# Altium PCB Test.PcbDoc (part 1 of 9)
Units mm, origin at the board's own origin, x right, y up, seen from the top; angles counter-clockwise.
Board outline 152.4 x 101.6 mm, 2 copper layers (Top Layer, Bottom Layer); 1 components, 0 nets, 1713 pads, 1 vias.
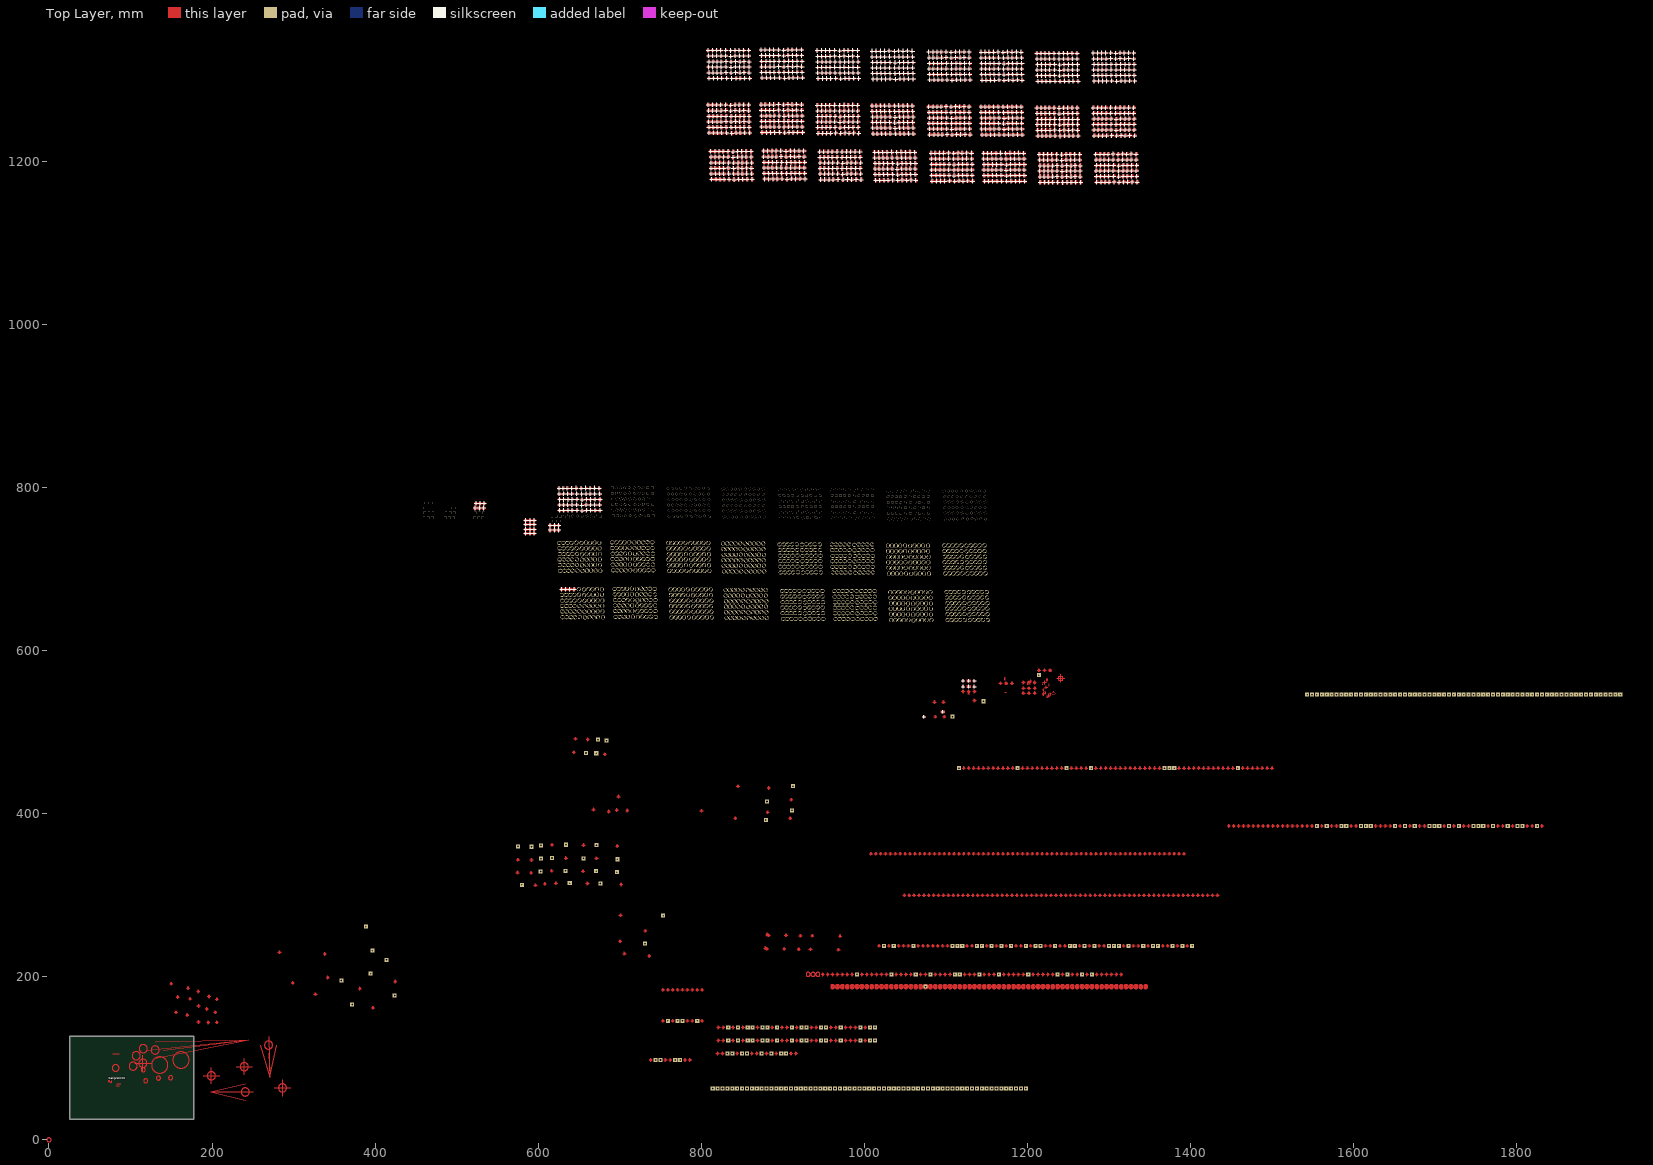
[diagram p0: Top Layer view]
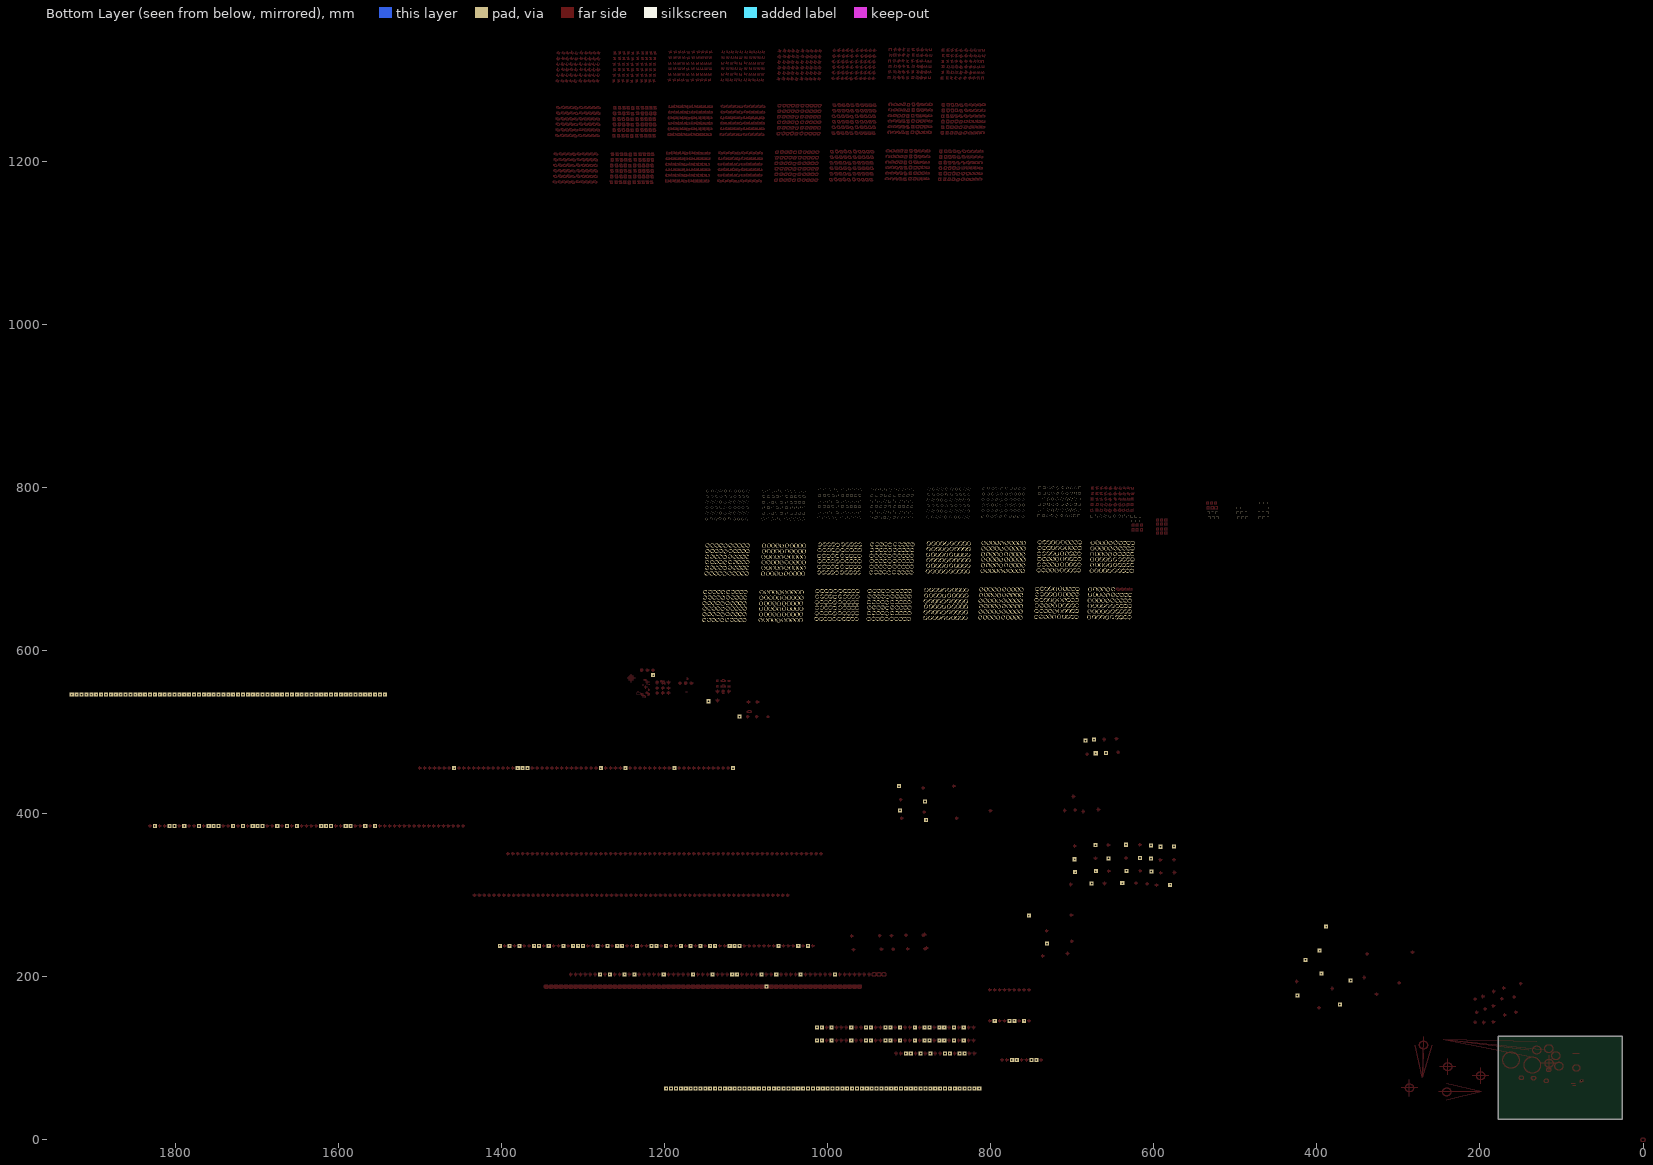
[diagram p1: Bottom Layer view, seen from below]

## Layer stack, top to bottom
Top Solder: solder mask 0.0102, Solder Resist, Dk 3.5
Top Layer: signal copper 0.0356
Dielectric 1: dielectric 0.32, FR-4, Dk 4.8
Bottom Layer: signal copper 0.0356
Bottom Solder: solder mask 0.0102, Solder Resist, Dk 3.5

## Board outline
25.4,25.4 177.8,25.4 177.8,127 25.4,127

## Design rules (kind name [scope] priority, off if disabled: settings)
Clearance [All] p1: gap=0.254 ignorepadtopadclearanceinfootprint=FALSE except(0: Arc-Hole Track-Hole SMDPad-Hole THPad-Hole Via-Hole Fill-Hole Poly-Hole Region-Hole Text-Hole)
PolygonConnect [All] p1: connectstyle=Relief reliefconductorwidth=0.254 reliefentries=4 polygonreliefangle="90 Angle" airgapwidth=0.254
RoutingVias [All] p1: holewidth=0.711 width=1.27 viastyle="Through Hole" minholewidth=0.711 minwidth=1.27 maxholewidth=0.711 maxwidth=1.27
SolderMaskExpansion [All] p1: expansion=0.102
Width [All] p1: maxlimit=5 minlimit=2539.975 preferedwidth=0.254 toplayer_minwidth=0 bottomlayer_minwidth=0 minimp=50.000000 maximp=50.000000 favimp=50.000000
30 further rules are at their usual default settings.

## Components (designator, comment, footprint, x,y, rotation, side; value= is the part's Value field where it differs from the comment)
Designator20 "Comment" TEST 73.152,71.374 r0 top

## Footprints (in the part's own frame and the unit in brackets; to place one, negate y for a bottom-side part, rotate by r counter-clockwise, add the part's x,y. Pads: shape width x height; smd on the part's side, far side on the other; paste and mask are expansions set on the pad)
TEST [mm]
  rect 0.2x0.25 smd: 0(0.635,1.27) 1(1.27,1.27)
  Top Layer circle w0.2: c3.175,0 r0.741
  Top Layer lines w0.2: 0,0 3.175,0 ccw(c2.222,0.953) 3.175,1.905 0,1.905 0,0

## Free pads (board coordinates)
  rect 5x5 hole 2: 0(1214,570) 1(358.648,195.453) 1(1108,519) 1(1146,538) 3(394.462,203.835) 4(388.62,261.493) 9(371.729,165.989) 11(423.926,177.165) 13(413.893,220.853) 14(396.494,232.029) 15(575.183,359.918) 15(591.82,359.537) 15(603.377,361.188) 15(633.984,361.95) 15(671.449,361.569) 15(753.237,274.955) 16(603.377,344.932) 16(616.966,345.694) 16(655.574,345.313) 16(696.976,344.17) 17(602.869,329.184) 17(633.476,329.946) 17(670.941,329.565) 17(696.468,328.422) 17(730.885,240.665) 18(579.882,312.801) 18(638.683,314.833) 18(676.148,314.452) 19(673.354,490.855) 19(683.768,489.585) 19(912.495,433.832) 20(658.622,474.472) 20(671.195,474.218) 20(880.491,415.036) 21(911.225,404.114) 22(879.221,392.303) 23(814,63) 23(1116,456) 23(1543,546) 24(744,98) 24(750,98) 24(759,146) 24(768,98) 24(771,146) 24(774,98) 24(777,146) 24(795,146) 24(820,63) 24(826,63) 24(832,63) 24(832,106) 24(833,122) 24(833,138) 24(838,63) 24(838,106) 24(844,63) 24(845,122) 24(845,138) 24(850,63) 24(850,106) 24(856,63) 24(856,106) 24(857,122) 24(857,138) 24(862,63) 24(863,122) 24(863,138) 24(868,63) 24(874,63) 24(874,106) 24(875,122) 24(875,138) 24(880,63) 24(881,122) 24(881,138) 24(886,63) 24(886,106) 24(892,63) 24(893,122) 24(893,138) 24(898,63) 24(898,106) 24(904,63) 24(904,106) 24(910,63) 24(911,122) 24(911,138) 24(916,63) 24(922,63) 24(923,122) 24(923,138) 24(928,63) 24(929,122) 24(929,138) 24(934,63) 24(940,63) 24(946,63) 24(947,122) 24(947,138) 24(952,63) 24(953,122) 24(953,138) 24(958,63) 24(964,63) 24(970,63) 24(971,122) 24(971,138) 24(976,63) 24(982,63) 24(988,63) 24(991,203) 24(994,63) 24(995,122) 24(995,138) 24(1000,63) 24(1006,63) 24(1007,122) 24(1007,138) 24(1012,63) 24(1013,122) 24(1013,138) 24(1018,63) 24(1024,238) 24(1024,63) 24(1030,63) 24(1033,203) 24(1036,238) 24(1036,63) 24(1042,63) 24(1048,63) 24(1054,63) 24(1060,238) 24(1060,63) 24(1063,203) 24(1066,63) 24(1072,63) 24(1075,188) 24(1078,63) 24(1081,203) 24(1084,63) 24(1090,63) 24(1096,63) 24(1102,63) 24(1108,238) 24(1108,63) 24(1111,203) 24(1114,238) 24(1114,63) 24(1117,203) 24(1120,238) 24(1120,63) 24(1126,63) 24(1132,63) 24(1138,238) 24(1138,63) 24(1141,203) 24(1144,238) 24(1144,63) 24(1150,63) 24(1156,238) 24(1156,63) 24(1162,63) 24(1165,203) 24(1168,238) 24(1168,63) 24(1174,63) 24(1180,238) 24(1180,63) 24(1186,63) 24(1188,456) 24(1192,63) 24(1198,238) 24(1198,63) 24(1201,203) 24(1210,238) 24(1216,238) 24(1234,238) 24(1237,203) 24(1248,456) 24(1249,203) 24(1252,238) 24(1258,238) 24(1267,203) 24(1270,238) 24(1278,456) 24(1279,203) 24(1282,238) 24(1300,238) 24(1306,238) 24(1312,238) 24(1324,238) 24(1342,238) 24(1354,238) 24(1360,238) 24(1368,456) 24(1374,456) 24(1378,238) 24(1380,456) 24(1390,238) 24(1402,238) 24(1458,456) 24(1549,546) 24(1555,385) 24(1555,546) 24(1561,546) 24(1567,385) 24(1567,546) 24(1573,546) 24(1579,546) 24(1585,385) 24(1585,546) 24(1591,385) 24(1591,546) 24(1597,546) 24(1603,546) 24(1609,385) 24(1609,546) 24(1615,385) 24(1615,546) 24(1621,385) 24(1621,546) 24(1627,546) 24(1633,546) 24(1639,546) 24(1645,546) 24(1651,546) 24(1651,385) 24(1657,546) 24(1663,546) 24(1663,385) 24(1669,546) 24(1675,546) 24(1675,385) 24(1681,546) 24(1687,546) 24(1693,546) 24(1693,385) 24(1699,546) 24(1699,385) 24(1705,546) 24(1705,385) 24(1711,546) 24(1717,546) 24(1717,385) 24(1723,546) 24(1729,546) 24(1729,385) 24(1735,546) 24(1741,546) 24(1747,385) 24(1747,546) 24(1753,385) 24(1753,546) 24(1759,385) 24(1759,546) 24(1765,546) 24(1771,385) 24(1771,546) 24(1777,546) 24(1783,546) 24(1789,385) 24(1789,546) 24(1795,546) 24(1801,385) 24(1801,546) 24(1807,385) 24(1807,546) 24(1813,546) 24(1819,546) 24(1825,385) 24(1825,546) 24(1831,546) 24(1837,546) 24(1843,546) 24(1849,546) 24(1855,546) 24(1861,546) 24(1867,546) 24(1873,546) 24(1879,546) 24(1885,546) 24(1891,546) 24(1897,546) 24(1903,546) 24(1909,546) 24(1915,546) 24(1921,546) 24(1927,546)
  rect 0x0 hole 2 slot 3 at 0 deg: 0(1232,547.5)
  rect 5x5 hole 5 square: 1(1230,558)
  rect 2.8x2.8 hole 2.54 square: 32(460,763) 32(461,769) 32(461,775) 32(462,781) 32(465,763) 32(466,769) 32(466,775) 32(467,781) 32(470,763) 32(471,769) 32(471,775) 32(472,781) 32(486,763) 32(487,769) 32(487,775) 32(488,781) 32(491,763) 32(492,769) 32(492,775) 32(493,781) 32(496,763) 32(497,769) 32(497,775) 32(498,781) 32(522,763) 32(523,769) 32(527,763) 32(528,769) 32(532,763) 32(533,769) 32(616,759) 32(617,765) 32(621,759) 32(622,765) 32(626,759) 32(627,765) 32(690.627,799.798) 32(691.135,779.351) 32(691.389,785.955) 32(691.897,765.508) 41(676.276,765) 41(739.903,799.798) 41(740.411,779.351) 41(740.665,785.955) 41(741.173,765.508)
  round 5 hole 2.54 slot 4 at 0 deg: 32(625.73,732.29) 32(626.238,711.843) 32(626.492,718.447) 32(627,698) 32(629.238,654.843) 32(629.492,661.447) 32(630,641) 32(690.627,732.798) 32(691.135,712.351) 32(691.389,718.955) 32(691.897,698.508) 32(693.627,675.798) 32(694.135,655.351) 32(694.389,661.955) 32(694.897,641.508) 41(739.903,732.798) 41(740.411,712.351) 41(740.665,718.955) 41(741.173,698.508) 41(742.903,675.798) 41(743.411,655.351) 41(743.665,661.955) 41(744.173,641.508)
  round 5 hole 2.54 slot 4 at 7 deg: 32(625.984,725.432) 32(628.984,668.432)
  round 5 hole 2.54 slot 4 at 173 deg: 32(626.492,704.985) 32(629.492,647.985)
  round 5 hole 2.54 slot 4 at 14 deg: 32(690.881,725.94) 32(693.881,668.94) 41(740.157,725.94) 41(743.157,668.94)
  rect 2.8x2.8 hole 2.54 square rot 7: 32(690.881,792.94)
  round 5 hole 2.54 slot 4 at 166 deg: 32(691.389,705.493) 32(694.389,648.493) 41(740.665,705.493) 41(743.665,648.493)
  rect 2.8x2.8 hole 2.54 square rot 173: 32(691.389,772.493)
  round 5 hole 2.54 slot 4 at 58 deg: 32(759.334,732.036) 32(759.588,725.178) 32(759.842,711.589) 32(760.096,704.731) 32(760.096,718.193) 32(760.604,697.746) 32(762.334,675.036) 32(762.588,668.178) 32(762.842,654.589) 32(763.096,647.731) 32(763.096,661.193) 32(763.604,640.746) 33(764.414,732.036) 33(764.668,725.178) 33(764.922,711.589) 33(765.176,704.731) 33(765.176,718.193) 33(765.684,697.746) 33(767.414,675.036) 33(767.668,668.178) 33(767.922,654.589) 33(768.176,647.731) 33(768.176,661.193) 33(768.684,640.746) 34(769.494,732.036) 34(769.748,725.178) 34(770.002,711.589) 34(770.256,704.731) 34(770.256,718.193) 34(770.764,697.746) 34(772.494,675.036) 34(772.748,668.178) 34(773.002,654.589) 34(773.256,647.731) 34(773.256,661.193) 34(773.764,640.746) 35(774.574,732.036) 35(774.828,725.178) 35(775.082,711.589) 35(775.336,704.731) 35(775.336,718.193) 35(775.844,697.746) 35(777.574,675.036) 35(777.828,668.178) 35(778.082,654.589) 35(778.336,647.731) 35(778.336,661.193) 35(778.844,640.746) 36(780.416,732.163) 36(780.67,725.305) 36(780.924,711.716) 36(781.178,704.858) 36(781.178,718.32) 36(781.686,697.873) 36(783.416,675.163) 36(783.67,668.305) 36(783.924,654.716) 36(784.178,647.858) 36(784.178,661.32) 36(784.686,640.873) 37(786.639,731.782) 37(786.893,724.924) 37(787.147,711.335) 37(787.401,704.477) 37(787.401,717.939) 37(787.909,697.492) 37(789.639,674.782) 37(789.893,667.924) 37(790.147,654.335) 37(790.401,647.477) 37(790.401,660.939) 37(790.909,640.492) 38(792.1,732.163) 38(792.354,725.305) 38(792.608,711.716) 38(792.862,704.858) 38(792.862,718.32) 38(793.37,697.873) 38(795.1,675.163) 38(795.354,668.305) 38(795.608,654.716) 38(795.862,647.858) 38(795.862,661.32) 38(796.37,640.873) 39(797.307,732.036) 39(797.561,725.178) 39(797.815,711.589) 39(798.069,704.731) 39(798.069,718.193) 39(798.577,697.746) 39(800.307,675.036) 39(800.561,668.178) 39(800.815,654.589) 39(801.069,647.731) 39(801.069,661.193) 39(801.577,640.746) 40(802.641,732.163) 40(802.895,725.305) 40(803.149,711.716) 40(803.403,704.858) 40(803.403,718.32) 40(803.911,697.873) 40(805.641,675.163) 40(805.895,668.305) 40(806.149,654.716) 40(806.403,647.858) 40(806.403,661.32) 40(806.911,640.873) 41(808.61,732.036) 41(808.864,725.178) 41(809.118,711.589) 41(809.372,704.731) 41(809.372,718.193) 41(809.88,697.746) 41(811.61,675.036) 41(811.864,668.178) 41(812.118,654.589) 41(812.372,647.731) 41(812.372,661.193) 41(812.88,640.746)
  rect 2.8x2.8 hole 2.54 square rot 58: 32(759.334,799.036) 32(759.588,792.178) 32(759.842,778.589) 32(760.096,771.731) 32(760.096,785.193) 32(760.604,764.746) 33(764.414,799.036) 33(764.668,792.178) 33(764.922,778.589) 33(765.176,771.731) 33(765.176,785.193) 33(765.684,764.746) 34(769.494,799.036) 34(769.748,792.178) 34(770.002,778.589) 34(770.256,771.731) 34(770.256,785.193) 34(770.764,764.746) 35(774.574,799.036) 35(774.828,792.178) 35(775.082,778.589) 35(775.336,771.731) 35(775.336,785.193) 35(775.844,764.746) 36(780.416,799.163) 36(780.67,792.305) 36(780.924,778.716) 36(781.178,771.858) 36(781.178,785.32) 36(781.686,764.873) 37(786.639,798.782) 37(786.893,791.924) 37(787.147,778.335) 37(787.401,771.477) 37(787.401,784.939) 37(787.909,764.492) 38(792.1,799.163) 38(792.354,792.305) 38(792.608,778.716) 38(792.862,771.858) 38(792.862,785.32) 38(793.37,764.873) 39(797.307,799.036) 39(797.561,792.178) 39(797.815,778.589) 39(798.069,771.731) 39(798.069,785.193) 39(798.577,764.746) 40(802.641,799.163) 40(802.895,792.305) 40(803.149,778.716) 40(803.403,771.858) 40(803.403,785.32) 40(803.911,764.873) 41(808.61,799.036) 41(808.864,792.178) 41(809.118,778.589) 41(809.372,771.731) 41(809.372,785.193) 41(809.88,764.746)
  round 5 hole 2.54 slot 4 at 122 deg: 32(826.644,731.401) 32(826.898,724.543) 32(827.152,710.954) 32(827.406,704.096) 32(827.406,717.558) 32(827.914,697.111) 32(829.644,674.401) 32(829.898,667.543) 32(830.152,653.954) 32(830.406,647.096) 32(830.406,660.558) 32(830.914,640.111) 33(831.724,731.401) 33(831.978,724.543) 33(832.232,710.954) 33(832.486,704.096) 33(832.486,717.558) 33(832.994,697.111) 33(834.724,674.401) 33(834.978,667.543) 33(835.232,653.954) 33(835.486,647.096) 33(835.486,660.558) 33(835.994,640.111) 34(836.804,731.401) 34(837.058,724.543) 34(837.312,710.954) 34(837.566,704.096) 34(837.566,717.558) 34(838.074,697.111) 34(839.804,674.401) 34(840.058,667.543) 34(840.312,653.954) 34(840.566,647.096) 34(840.566,660.558) 34(841.074,640.111) 35(841.884,731.401) 35(842.138,724.543) 35(842.392,710.954) 35(842.646,704.096) 35(842.646,717.558) 35(843.154,697.111) 35(844.884,674.401) 35(845.138,667.543) 35(845.392,653.954) 35(845.646,647.096) 35(845.646,660.558) 35(846.154,640.111) 36(847.726,731.528) 36(847.98,724.67) 36(848.234,711.081) 36(848.488,704.223) 36(848.488,717.685) 36(848.996,697.238) 36(850.726,674.528) 36(850.98,667.67) 36(851.234,654.081) 36(851.488,647.223) 36(851.488,660.685) 36(851.996,640.238) 37(853.949,731.147) 37(854.203,724.289) 37(854.457,710.7) 37(854.711,703.842) 37(854.711,717.304) 37(855.219,696.857) 37(856.949,674.147) 37(857.203,667.289) 37(857.457,653.7) 37(857.711,646.842) 37(857.711,660.304) 37(858.219,639.857) 38(859.41,731.528) 38(859.664,724.67) 38(859.918,711.081) 38(860.172,704.223) 38(860.172,717.685) 38(860.68,697.238) 38(862.41,674.528) 38(862.664,667.67) 38(862.918,654.081) 38(863.172,647.223) 38(863.172,660.685) 38(863.68,640.238) 39(864.617,731.401) 39(864.871,724.543) 39(865.125,710.954) 39(865.379,704.096) 39(865.379,717.558) 39(865.887,697.111) 39(867.617,674.401) 39(867.871,667.543) 39(868.125,653.954) 39(868.379,647.096) 39(868.379,660.558) 39(868.887,640.111) 40(869.951,731.528) 40(870.205,724.67) 40(870.459,711.081) 40(870.713,704.223) 40(870.713,717.685) 40(871.221,697.238) 40(872.951,674.528) 40(873.205,667.67) 40(873.459,654.081) 40(873.713,647.223) 40(873.713,660.685) 40(874.221,640.238) 41(875.92,731.401) 41(876.174,724.543) 41(876.428,710.954) 41(876.682,704.096) 41(876.682,717.558) 41(877.19,697.111) 41(878.92,674.401) 41(879.174,667.543) 41(879.428,653.954) 41(879.682,647.096) 41(879.682,660.558) 41(880.19,640.111)
  rect 2.8x2.8 hole 2.54 square rot 122: 32(826.644,798.401) 32(826.898,791.543) 32(827.152,777.954) 32(827.406,771.096) 32(827.406,784.558) 32(827.914,764.111) 33(831.724,798.401) 33(831.978,791.543) 33(832.232,777.954) 33(832.486,771.096) 33(832.486,784.558) 33(832.994,764.111) 34(836.804,798.401) 34(837.058,791.543) 34(837.312,777.954) 34(837.566,771.096) 34(837.566,784.558) 34(838.074,764.111) 35(841.884,798.401) 35(842.138,791.543) 35(842.392,777.954) 35(842.646,771.096) 35(842.646,784.558) 35(843.154,764.111) 36(847.726,798.528) 36(847.98,791.67) 36(848.234,778.081) 36(848.488,771.223) 36(848.488,784.685) 36(848.996,764.238) 37(853.949,798.147) 37(854.203,791.289) 37(854.457,777.7) 37(854.711,770.842) 37(854.711,784.304) 37(855.219,763.857) 38(859.41,798.528) 38(859.664,791.67) 38(859.918,778.081) 38(860.172,771.223) 38(860.172,784.685) 38(860.68,764.238) 39(864.617,798.401) 39(864.871,791.543) 39(865.125,777.954) 39(865.379,771.096) 39(865.379,784.558) 39(865.887,764.111) 40(869.951,798.528) 40(870.205,791.67) 40(870.459,778.081) 40(870.713,771.223) 40(870.713,784.685) 40(871.221,764.238) 41(875.92,798.401) 41(876.174,791.543) 41(876.428,777.954) 41(876.682,771.096) 41(876.682,784.558) 41(877.19,764.111)
  round 5 hole 2.54 slot 4 at 10.7 deg: 32(896.113,730.258) 32(896.367,723.4) 32(896.621,709.811) 32(896.875,702.953) 32(896.875,716.415) 32(897.383,695.968) 32(899.113,673.258) 32(899.367,666.4) 32(899.621,652.811) 32(899.875,645.953) 32(899.875,659.415) 32(900.383,638.968) 33(901.193,730.258) 33(901.447,723.4) 33(901.701,709.811) 33(901.955,702.953) 33(901.955,716.415) 33(902.463,695.968) 33(904.193,673.258) 33(904.447,666.4) 33(904.701,652.811) 33(904.955,645.953) 33(904.955,659.415) 33(905.463,638.968) 34(906.273,730.258) 34(906.527,723.4) 34(906.781,709.811) 34(907.035,702.953) 34(907.035,716.415) 34(907.543,695.968) 34(909.273,673.258) 34(909.527,666.4) 34(909.781,652.811) 34(910.035,645.953) 34(910.035,659.415) 34(910.543,638.968) 35(911.353,730.258) 35(911.607,723.4) 35(911.861,709.811) 35(912.115,702.953) 35(912.115,716.415) 35(912.623,695.968) 35(914.353,673.258) 35(914.607,666.4) 35(914.861,652.811) 35(915.115,645.953) 35(915.115,659.415) 35(915.623,638.968) 36(917.195,730.385) 36(917.449,723.527) 36(917.703,709.938) 36(917.957,703.08) 36(917.957,716.542) 36(918.465,696.095) 36(920.195,673.385) 36(920.449,666.527) 36(920.703,652.938) 36(920.957,646.08) 36(920.957,659.542) 36(921.465,639.095) 37(923.418,730.004) 37(923.672,723.146) 37(923.926,709.557) 37(924.18,702.699) 37(924.18,716.161) 37(924.688,695.714) 37(926.418,673.004) 37(926.672,666.146) 37(926.926,652.557) 37(927.18,645.699) 37(927.18,659.161) 37(927.688,638.714) 38(928.879,730.385) 38(929.133,723.527) 38(929.387,709.938) 38(929.641,703.08) 38(929.641,716.542) 38(930.149,696.095) 38(931.879,673.385) 38(932.133,666.527) 38(932.387,652.938) 38(932.641,646.08) 38(932.641,659.542) 38(933.149,639.095) 39(934.086,730.258) 39(934.34,723.4) 39(934.594,709.811) 39(934.848,702.953) 39(934.848,716.415) 39(935.356,695.968) 39(937.086,673.258) 39(937.34,666.4) 39(937.594,652.811) 39(937.848,645.953) 39(937.848,659.415) 39(938.356,638.968) 40(939.42,730.385) 40(939.674,723.527) 40(939.928,709.938) 40(940.182,703.08) 40(940.182,716.542) 40(940.69,696.095) 40(942.42,673.385) 40(942.674,666.527) 40(942.928,652.938) 40(943.182,646.08) 40(943.182,659.542) 40(943.69,639.095) 41(945.389,730.258) 41(945.643,723.4) 41(945.897,709.811) 41(946.151,702.953) 41(946.151,716.415) 41(946.659,695.968) 41(948.389,673.258) 41(948.643,666.4) 41(948.897,652.811) 41(949.151,645.953) 41(949.151,659.415) 41(949.659,638.968)
  rect 2.8x2.8 hole 2.54 square rot 10.7: 32(896.113,797.258) 32(896.367,790.4) 32(896.621,776.811) 32(896.875,769.953) 32(896.875,783.415) 32(897.383,762.968) 33(901.193,797.258) 33(901.447,790.4) 33(901.701,776.811) 33(901.955,769.953) 33(901.955,783.415) 33(902.463,762.968) 34(906.273,797.258) 34(906.527,790.4) 34(906.781,776.811) 34(907.035,769.953) 34(907.035,783.415) 34(907.543,762.968) 35(911.353,797.258) 35(911.607,790.4) 35(911.861,776.811) 35(912.115,769.953) 35(912.115,783.415) 35(912.623,762.968) 36(917.195,797.385) 36(917.449,790.527) 36(917.703,776.938) 36(917.957,770.08) 36(917.957,783.542) 36(918.465,763.095) 37(923.418,797.004) 37(923.672,790.146) 37(923.926,776.557) 37(924.18,769.699) 37(924.18,783.161) 37(924.688,762.714) 38(928.879,797.385) 38(929.133,790.527) 38(929.387,776.938) 38(929.641,770.08) 38(929.641,783.542) 38(930.149,763.095) 39(934.086,797.258) 39(934.34,790.4) 39(934.594,776.811) 39(934.848,769.953) 39(934.848,783.415) 39(935.356,762.968) 40(939.42,797.385) 40(939.674,790.527) 40(939.928,776.938) 40(940.182,770.08) 40(940.182,783.542) 40(940.69,763.095) 41(945.389,797.258) 41(945.643,790.4) 41(945.897,776.811) 41(946.151,769.953) 41(946.151,783.415) 41(946.659,762.968)
  round 5 hole 2.54 slot 4 at 169.3 deg: 32(960.248,730.131) 32(960.502,723.273) 32(960.756,709.684) 32(961.01,702.826) 32(961.01,716.288) 32(961.518,695.841) 32(963.248,673.131) 32(963.502,666.273) 32(963.756,652.684) 32(964.01,645.826) 32(964.01,659.288) 32(964.518,638.841) 33(965.328,730.131) 33(965.582,723.273) 33(965.836,709.684) 33(966.09,702.826) 33(966.09,716.288) 33(966.598,695.841) 33(968.328,673.131) 33(968.582,666.273) 33(968.836,652.684) 33(969.09,645.826) 33(969.09,659.288) 33(969.598,638.841) 34(970.408,730.131) 34(970.662,723.273) 34(970.916,709.684) 34(971.17,702.826) 34(971.17,716.288) 34(971.678,695.841) 34(973.408,673.131) 34(973.662,666.273) 34(973.916,652.684) 34(974.17,645.826) 34(974.17,659.288) 34(974.678,638.841) 35(975.488,730.131) 35(975.742,723.273) 35(975.996,709.684) 35(976.25,702.826) 35(976.25,716.288) 35(976.758,695.841) 35(978.488,673.131) 35(978.742,666.273) 35(978.996,652.684) 35(979.25,645.826) 35(979.25,659.288) 35(979.758,638.841) 36(981.33,730.258) 36(981.584,723.4) 36(981.838,709.811) 36(982.092,702.953) 36(982.092,716.415) 36(982.6,695.968) 36(984.33,673.258) 36(984.584,666.4) 36(984.838,652.811) 36(985.092,645.953) 36(985.092,659.415) 36(985.6,638.968) 37(987.553,729.877) 37(987.807,723.019) 37(988.061,709.43) 37(988.315,702.572) 37(988.315,716.034) 37(988.823,695.587) 37(990.553,672.877) 37(990.807,666.019) 37(991.061,652.43) 37(991.315,645.572) 37(991.315,659.034) 37(991.823,638.587) 38(993.014,730.258) 38(993.268,723.4) 38(993.522,709.811) 38(993.776,702.953) 38(993.776,716.415) 38(994.284,695.968) 38(996.014,673.258) 38(996.268,666.4) 38(996.522,652.811) 38(996.776,645.953) 38(996.776,659.415) 38(997.284,638.968) 39(998.221,730.131) 39(998.475,723.273) 39(998.729,709.684) 39(998.983,702.826) 39(998.983,716.288) 39(999.491,695.841) 39(1001.221,673.131) 39(1001.475,666.273) 39(1001.729,652.684) 39(1001.983,645.826) 39(1001.983,659.288) 39(1002.491,638.841) 40(1003.555,730.258) 40(1003.809,723.4) 40(1004.063,709.811) 40(1004.317,702.953) 40(1004.317,716.415) 40(1004.825,695.968) 40(1006.555,673.258) 40(1006.809,666.4) 40(1007.063,652.811) 40(1007.317,645.953) 40(1007.317,659.415) 40(1007.825,638.968) 41(1009.524,730.131) 41(1009.778,723.273) 41(1010.032,709.684) 41(1010.286,702.826) 41(1010.286,716.288) 41(1010.794,695.841) 41(1012.524,673.131) 41(1012.778,666.273) 41(1013.032,652.684) 41(1013.286,645.826) 41(1013.286,659.288) 41(1013.794,638.841)
  rect 2.8x2.8 hole 2.54 square rot 169.3: 32(960.248,797.131) 32(960.502,790.273) 32(960.756,776.684) 32(961.01,769.826) 32(961.01,783.288) 32(961.518,762.841) 33(965.328,797.131) 33(965.582,790.273) 33(965.836,776.684) 33(966.09,769.826) 33(966.09,783.288) 33(966.598,762.841) 34(970.408,797.131) 34(970.662,790.273) 34(970.916,776.684) 34(971.17,769.826) 34(971.17,783.288) 34(971.678,762.841) 35(975.488,797.131) 35(975.742,790.273) 35(975.996,776.684) 35(976.25,769.826) 35(976.25,783.288) 35(976.758,762.841) 36(981.33,797.258) 36(981.584,790.4) 36(981.838,776.811) 36(982.092,769.953) 36(982.092,783.415) 36(982.6,762.968) 37(987.553,796.877) 37(987.807,790.019) 37(988.061,776.43) 37(988.315,769.572) 37(988.315,783.034) 37(988.823,762.587) 38(993.014,797.258) 38(993.268,790.4) 38(993.522,776.811) 38(993.776,769.953) 38(993.776,783.415) 38(994.284,762.968) 39(998.221,797.131) 39(998.475,790.273) 39(998.729,776.684) 39(998.983,769.826) 39(998.983,783.288) 39(999.491,762.841) 40(1003.555,797.258) 40(1003.809,790.4) 40(1004.063,776.811) 40(1004.317,769.953) 40(1004.317,783.415) 40(1004.825,762.968) 41(1009.524,797.131) 41(1009.778,790.273) 41(1010.032,776.684) 41(1010.286,769.826) 41(1010.286,783.288) 41(1010.794,762.841)
  round 5 hole 2.54 slot 4 at 80 deg: 32(1028.701,728.734) 32(1028.955,721.876) 32(1029.209,708.287) 32(1029.463,701.429) 32(1029.463,714.891) 32(1029.971,694.444) 32(1031.701,671.734) 32(1031.955,664.876) 32(1032.209,651.287) 32(1032.463,644.429) 32(1032.463,657.891) 32(1032.971,637.444) 33(1033.781,728.734) 33(1034.035,721.876) 33(1034.289,708.287) 33(1034.543,701.429) 33(1034.543,714.891) 33(1035.051,694.444) 33(1036.781,671.734) 33(1037.035,664.876) 33(1037.289,651.287) 33(1037.543,644.429) 33(1037.543,657.891) 33(1038.051,637.444) 34(1038.861,728.734) 34(1039.115,721.876) 34(1039.369,708.287) 34(1039.623,701.429) 34(1039.623,714.891) 34(1040.131,694.444) 34(1041.861,671.734) 34(1042.115,664.876) 34(1042.369,651.287) 34(1042.623,644.429) 34(1042.623,657.891) 34(1043.131,637.444) 35(1043.941,728.734) 35(1044.195,721.876) 35(1044.449,708.287) 35(1044.703,701.429) 35(1044.703,714.891) 35(1045.211,694.444) 35(1046.941,671.734) 35(1047.195,664.876) 35(1047.449,651.287) 35(1047.703,644.429) 35(1047.703,657.891) 35(1048.211,637.444) 36(711.709,732.925) 36(712.471,719.082) 36(714.709,675.925) 36(715.471,662.082) 36(1049.783,728.861) 36(1050.037,722.003) 36(1050.291,708.414) 36(1050.545,701.556) 36(1050.545,715.018) 36(1051.053,694.571) 36(1052.783,671.861) 36(1053.037,665.003) 36(1053.291,651.414) 36(1053.545,644.556) 36(1053.545,658.018) 36(1054.053,637.571) 37(718.44,712.097) 37(719.202,698.254) 37(721.44,655.097) 37(722.202,641.254) 37(1056.006,728.48) 37(1056.26,721.622) 37(1056.514,708.033) 37(1056.768,701.175) 37(1056.768,714.637) 37(1057.276,694.19) 37(1059.006,671.48) 37(1059.26,664.622) 37(1059.514,651.033) 37(1059.768,644.175) 37(1059.768,657.637) 37(1060.276,637.19) 38(1061.467,728.861) 38(1061.721,722.003) 38(1061.975,708.414) 38(1062.229,701.556) 38(1062.229,715.018) 38(1062.737,694.571) 38(1064.467,671.861) 38(1064.721,665.003) 38(1064.975,651.414) 38(1065.229,644.556) 38(1065.229,658.018) 38(1065.737,637.571) 39(1066.674,728.734) 39(1066.928,721.876) 39(1067.182,708.287) 39(1067.436,701.429) 39(1067.436,714.891) 39(1067.944,694.444) 39(1069.674,671.734) 39(1069.928,664.876) 39(1070.182,651.287) 39(1070.436,644.429) 39(1070.436,657.891) 39(1070.944,637.444) 40(669.037,732.417) 40(669.799,718.574) 40(672.037,675.417) 40(672.799,661.574) 40(1072.008,728.861) 40(1072.262,722.003) 40(1072.516,708.414) 40(1072.77,701.556) 40(1072.77,715.018) 40(1073.278,694.571) 40(1075.008,671.861) 40(1075.262,665.003) 40(1075.516,651.414) 40(1075.77,644.556) 40(1075.77,658.018) 40(1076.278,637.571) 41(1077.977,728.734) 41(1078.231,721.876) 41(1078.485,708.287) 41(1078.739,701.429) 41(1078.739,714.891) 41(1079.247,694.444) 41(1080.977,671.734) 41(1081.231,664.876) 41(1081.485,651.287) 41(1081.739,644.429) 41(1081.739,657.891) 41(1082.247,637.444)
  rect 2.8x2.8 hole 2.54 square rot 80: 32(1028.701,795.734) 32(1028.955,788.876) 32(1029.209,775.287) 32(1029.463,768.429) 32(1029.463,781.891) 32(1029.971,761.444) 33(1033.781,795.734) 33(1034.035,788.876) 33(1034.289,775.287) 33(1034.543,768.429) 33(1034.543,781.891) 33(1035.051,761.444) 34(1038.861,795.734) 34(1039.115,788.876) 34(1039.369,775.287) 34(1039.623,768.429) 34(1039.623,781.891) 34(1040.131,761.444) 35(1043.941,795.734) 35(1044.195,788.876) 35(1044.449,775.287) 35(1044.703,768.429) 35(1044.703,781.891) 35(1045.211,761.444) 36(1049.783,795.861) 36(1050.037,789.003) 36(1050.291,775.414) 36(1050.545,768.556) 36(1050.545,782.018) 36(1051.053,761.571) 37(1056.006,795.48) 37(1056.26,788.622) 37(1056.514,775.033) 37(1056.768,768.175) 37(1056.768,781.637) 37(1057.276,761.19) 38(1061.467,795.861) 38(1061.721,789.003) 38(1061.975,775.414) 38(1062.229,768.556) 38(1062.229,782.018) 38(1062.737,761.571) 39(1066.674,795.734) 39(1066.928,788.876) 39(1067.182,775.287) 39(1067.436,768.429) 39(1067.436,781.891) 39(1067.944,761.444) 40(733.934,799.925) 40(734.696,786.082) 40(1072.008,795.861) 40(1072.262,789.003) 40(1072.516,775.414) 40(1072.77,768.556) 40(1072.77,782.018) 40(1073.278,761.571) 41(1077.977,795.734) 41(1078.231,788.876) 41(1078.485,775.287) 41(1078.739,768.429) 41(1078.739,781.891) 41(1079.247,761.444)
  round 5 hole 2.54 slot 4 at 32.42 deg: 32(1097.916,728.988) 32(1098.17,722.13) 32(1098.424,708.541) 32(1098.678,701.683) 32(1098.678,715.145) 32(1099.186,694.698) 32(1100.916,671.988) 32(1101.17,665.13) 32(1101.424,651.541) 32(1101.678,644.683) 32(1101.678,658.145) 32(1102.186,637.698) 33(1102.996,728.988) 33(1103.25,722.13) 33(1103.504,708.541) 33(1103.758,701.683) 33(1103.758,715.145) 33(1104.266,694.698) 33(1105.996,671.988) 33(1106.25,665.13) 33(1106.504,651.541) 33(1106.758,644.683) 33(1106.758,658.145) 33(1107.266,637.698) 34(1108.076,728.988) 34(1108.33,722.13) 34(1108.584,708.541) 34(1108.838,701.683) 34(1108.838,715.145) 34(1109.346,694.698) 34(1111.076,671.988) 34(1111.33,665.13) 34(1111.584,651.541) 34(1111.838,644.683) 34(1111.838,658.145) 34(1112.346,637.698) 35(1113.156,728.988) 35(1113.41,722.13) 35(1113.664,708.541) 35(1113.918,701.683) 35(1113.918,715.145) 35(1114.426,694.698) 35(1116.156,671.988) 35(1116.41,665.13) 35(1116.664,651.541) 35(1116.918,644.683) 35(1116.918,658.145) 35(1117.426,637.698) 36(1118.998,729.115) 36(1119.252,722.257) 36(1119.506,708.668) 36(1119.76,701.81) 36(1119.76,715.272) 36(1120.268,694.825) 36(1121.998,672.115) 36(1122.252,665.257) 36(1122.506,651.668) 36(1122.76,644.81) 36(1122.76,658.272) 36(1123.268,637.825) 37(1125.221,728.734) 37(1125.475,721.876) 37(1125.729,708.287) 37(1125.983,701.429) 37(1125.983,714.891) 37(1126.491,694.444) 37(1128.221,671.734) 37(1128.475,664.876) 37(1128.729,651.287) 37(1128.983,644.429) 37(1128.983,657.891) 37(1129.491,637.444) 38(1130.682,729.115) 38(1130.936,722.257) 38(1131.19,708.668) 38(1131.444,701.81) 38(1131.444,715.272) 38(1131.952,694.825) 38(1133.682,672.115) 38(1133.936,665.257) 38(1134.19,651.668) 38(1134.444,644.81) 38(1134.444,658.272) 38(1134.952,637.825) 39(1135.889,728.988) 39(1136.143,722.13) 39(1136.397,708.541) 39(1136.651,701.683) 39(1136.651,715.145) 39(1137.159,694.698) 39(1138.889,671.988) 39(1139.143,665.13) 39(1139.397,651.541) 39(1139.651,644.683) 39(1139.651,658.145) 39(1140.159,637.698) 40(1141.223,729.115) 40(1141.477,722.257) 40(1141.731,708.668) 40(1141.985,701.81) 40(1141.985,715.272) 40(1142.493,694.825) 40(1144.223,672.115) 40(1144.477,665.257) 40(1144.731,651.668) 40(1144.985,644.81) 40(1144.985,658.272) 40(1145.493,637.825) 41(1147.192,728.988) 41(1147.446,722.13) 41(1147.7,708.541) 41(1147.954,701.683) 41(1147.954,715.145) 41(1148.462,694.698) 41(1150.192,671.988) 41(1150.446,665.13) 41(1150.7,651.541) 41(1150.954,644.683) 41(1150.954,658.145) 41(1151.462,637.698)
  rect 2.8x2.8 hole 2.54 square rot 32.42: 32(1097.916,795.988) 32(1098.17,789.13) 32(1098.424,775.541) 32(1098.678,768.683) 32(1098.678,782.145) 32(1099.186,761.698) 33(1102.996,795.988) 33(1103.25,789.13) 33(1103.504,775.541) 33(1103.758,768.683) 33(1103.758,782.145) 33(1104.266,761.698) 34(1108.076,795.988) 34(1108.33,789.13) 34(1108.584,775.541) 34(1108.838,768.683) 34(1108.838,782.145) 34(1109.346,761.698) 35(1113.156,795.988) 35(1113.41,789.13) 35(1113.664,775.541) 35(1113.918,768.683) 35(1113.918,782.145) 35(1114.426,761.698) 36(1118.998,796.115) 36(1119.252,789.257) 36(1119.506,775.668) 36(1119.76,768.81) 36(1119.76,782.272) 36(1120.268,761.825) 37(1125.221,795.734) 37(1125.475,788.876) 37(1125.729,775.287) 37(1125.983,768.429) 37(1125.983,781.891) 37(1126.491,761.444) 38(1130.682,796.115) 38(1130.936,789.257) 38(1131.19,775.668) 38(1131.444,768.81) 38(1131.444,782.272) 38(1131.952,761.825) 39(1135.889,795.988) 39(1136.143,789.13) 39(1136.397,775.541) 39(1136.651,768.683) 39(1136.651,782.145) 39(1137.159,761.698) 40(1141.223,796.115) 40(1141.477,789.257) 40(1141.731,775.668) 40(1141.985,768.81) 40(1141.985,782.272) 40(1142.493,761.825) 41(1147.192,795.988) 41(1147.446,789.13) 41(1147.7,775.541) 41(1147.954,768.683) 41(1147.954,782.145) 41(1148.462,761.698)
  round 5 hole 2.54 slot 4 at 10 deg: 33(630.81,732.29) 33(631.572,718.447) 33(634.572,661.447)
  round 5 hole 2.54 slot 4 at 17 deg: 33(631.064,725.432) 33(634.064,668.432)
  round 5 hole 2.54 slot 4 at 170 deg: 33(631.318,711.843) 33(632.08,698) 33(634.318,654.843) 33(635.08,641)
  round 5 hole 2.54 slot 4 at 163 deg: 33(631.572,704.985) 33(634.572,647.985)
  rect 2.8x2.8 hole 2.54 square rot 170: 33(632.08,765) 33(696.215,779.351) 33(696.977,765.508)
  round 5 hole 2.54 slot 4 at 20 deg: 33(695.707,732.798) 33(696.469,718.955) 33(698.707,675.798) 33(699.469,661.955) 34(635.89,732.29) 34(636.652,718.447) 34(639.652,661.447) 40(734.442,712.478) 40(735.204,698.635) 40(737.442,655.478) 40(738.204,641.635)
  rect 2.8x2.8 hole 2.54 square rot 10: 33(695.707,799.798) 33(696.469,785.955)
  round 5 hole 2.54 slot 4 at 34 deg: 33(695.961,725.94) 33(698.961,668.94)
  rect 2.8x2.8 hole 2.54 square rot 17: 33(695.961,792.94)
  round 5 hole 2.54 slot 4 at 160 deg: 33(696.215,712.351) 33(696.977,698.508) 33(699.215,655.351) 33(699.977,641.508) 34(636.398,711.843) 34(637.16,698) 34(639.398,654.843) 34(640.16,641) 34(701.549,718.955) 34(704.549,661.955) 40(733.934,732.925) 40(734.696,719.082) 40(736.934,675.925) 40(737.696,662.082)
  round 5 hole 2.54 slot 4 at 146 deg: 33(696.469,705.493) 33(699.469,648.493)
  rect 2.8x2.8 hole 2.54 square rot 163: 33(696.469,772.493)
  round 5 hole 2.54 slot 4 at 27 deg: 34(636.144,725.432) 34(639.144,668.432)
  round 5 hole 2.54 slot 4 at 153 deg: 34(636.652,704.985) 34(639.652,647.985)
  rect 2.8x2.8 hole 2.54 square rot 160: 34(637.16,765) 34(701.295,779.351) 34(702.057,765.508)
  round 5 hole 2.54 slot 4 at 40 deg: 34(700.787,732.798) 34(703.787,675.798) 36(646.812,732.417) 36(647.574,718.574) 36(649.812,675.417) 36(650.574,661.574) 39(729.108,712.351) 39(729.87,698.508) 39(732.108,655.351) 39(732.87,641.508)
  rect 2.8x2.8 hole 2.54 square rot 20: 34(700.787,799.798) 34(701.549,785.955)
  round 5 hole 2.54 slot 4 at 54 deg: 34(701.041,725.94) 34(704.041,668.94)
  rect 2.8x2.8 hole 2.54 square rot 27: 34(701.041,792.94)
  round 5 hole 2.54 slot 4 at 140 deg: 34(701.295,712.351) 34(702.057,698.508) 34(704.295,655.351) 34(705.057,641.508) 36(647.32,711.97) 36(648.082,698.127) 36(650.32,654.97) 36(651.082,641.127) 39(728.6,732.798) 39(729.362,718.955) 39(731.6,675.798) 39(732.362,661.955)
  round 5 hole 2.54 slot 4 at 126 deg: 34(701.549,705.493) 34(704.549,648.493)
  rect 2.8x2.8 hole 2.54 square rot 153: 34(701.549,772.493)
  round 5 hole 2.54 slot 4 at 30 deg: 35(640.97,732.29) 35(641.732,718.447) 35(644.732,661.447)
  round 5 hole 2.54 slot 4 at 37 deg: 35(641.224,725.432) 35(644.224,668.432)
  round 5 hole 2.54 slot 4 at 150 deg: 35(641.478,711.843) 35(642.24,698) 35(644.478,654.843) 35(645.24,641)
  round 5 hole 2.54 slot 4 at 143 deg: 35(641.732,704.985) 35(644.732,647.985)
  rect 2.8x2.8 hole 2.54 square rot 150: 35(642.24,765) 35(706.375,779.351) 35(707.137,765.508)
  round 5 hole 2.54 slot 4 at 60 deg: 35(705.867,732.798) 35(706.629,718.955) 35(708.867,675.798) 35(709.629,661.955) 38(658.496,732.417) 38(659.258,718.574) 38(661.496,675.417) 38(662.258,661.574) 38(723.901,712.478) 38(724.663,698.635) 38(726.901,655.478) 38(727.663,641.635)
  rect 2.8x2.8 hole 2.54 square rot 30: 35(705.867,799.798) 35(706.629,785.955)
  round 5 hole 2.54 slot 4 at 74 deg: 35(706.121,725.94) 35(709.121,668.94)
  rect 2.8x2.8 hole 2.54 square rot 37: 35(706.121,792.94)
  round 5 hole 2.54 slot 4 at 120 deg: 35(706.375,712.351) 35(707.137,698.508) 35(709.375,655.351) 35(710.137,641.508) 38(659.004,711.97) 38(659.766,698.127) 38(662.004,654.97) 38(662.766,641.127) 38(723.393,732.925) 38(724.155,719.082) 38(726.393,675.925) 38(727.155,662.082)
  round 5 hole 2.54 slot 4 at 106 deg: 35(706.629,705.493) 35(709.629,648.493)
  rect 2.8x2.8 hole 2.54 square rot 143: 35(706.629,772.493)
  round 5 hole 2.54 slot 4 at 47 deg: 36(647.066,725.559) 36(650.066,668.559)
  round 5 hole 2.54 slot 4 at 133 deg: 36(647.574,705.112) 36(650.574,648.112)
  rect 2.8x2.8 hole 2.54 square rot 140: 36(648.082,765.127) 36(712.217,779.478) 36(712.979,765.635)
  rect 2.8x2.8 hole 2.54 square rot 40: 36(711.709,799.925) 36(712.471,786.082)
  round 5 hole 2.54 slot 4 at 94 deg: 36(711.963,726.067) 36(714.963,669.067)
  rect 2.8x2.8 hole 2.54 square rot 47: 36(711.963,793.067)
  round 5 hole 2.54 slot 4 at 100 deg: 36(712.217,712.478) 36(712.979,698.635) 36(715.217,655.478) 36(715.979,641.635) 37(717.932,732.544) 37(718.694,718.701) 37(720.932,675.544) 37(721.694,661.701) 40(669.545,711.97) 40(670.307,698.127) 40(672.545,654.97) 40(673.307,641.127)
  round 5 hole 2.54 slot 4 at 86 deg: 36(712.471,705.62) 36(715.471,648.62)
  rect 2.8x2.8 hole 2.54 square rot 133: 36(712.471,772.62)
  round 5 hole 2.54 slot 4 at 50 deg: 37(653.035,732.036) 37(653.797,718.193) 37(656.035,675.036) 37(656.797,661.193)
  round 5 hole 2.54 slot 4 at 57 deg: 37(653.289,725.178) 37(656.289,668.178)
  round 5 hole 2.54 slot 4 at 130 deg: 37(653.543,711.589) 37(654.305,697.746) 37(656.543,654.589) 37(657.305,640.746)
  round 5 hole 2.54 slot 4 at 123 deg: 37(653.797,704.731) 37(656.797,647.731)
  rect 2.8x2.8 hole 2.54 square rot 130: 37(654.305,764.746) 37(718.44,779.097) 37(719.202,765.254)
  rect 2.8x2.8 hole 2.54 square rot 50: 37(717.932,799.544) 37(718.694,785.701)
  round 5 hole 2.54 slot 4 at 114 deg: 37(718.186,725.686) 37(721.186,668.686)
  rect 2.8x2.8 hole 2.54 square rot 57: 37(718.186,792.686)
  round 5 hole 2.54 slot 4 at 66 deg: 37(718.694,705.239) 37(721.694,648.239)
  rect 2.8x2.8 hole 2.54 square rot 123: 37(718.694,772.239)
  round 5 hole 2.54 slot 4 at 67 deg: 38(658.75,725.559) 38(661.75,668.559)
  round 5 hole 2.54 slot 4 at 113 deg: 38(659.258,705.112) 38(662.258,648.112)
  rect 2.8x2.8 hole 2.54 square rot 120: 38(659.766,765.127) 38(723.901,779.478) 38(724.663,765.635)
  rect 2.8x2.8 hole 2.54 square rot 60: 38(723.393,799.925) 38(724.155,786.082)
  round 5 hole 2.54 slot 4 at 134 deg: 38(723.647,726.067) 38(726.647,669.067)
  rect 2.8x2.8 hole 2.54 square rot 67: 38(723.647,793.067)
  round 5 hole 2.54 slot 4 at 46 deg: 38(724.155,705.62) 38(727.155,648.62)
  rect 2.8x2.8 hole 2.54 square rot 113: 38(724.155,772.62)
  round 5 hole 2.54 slot 4 at 70 deg: 39(663.703,732.29) 39(664.465,718.447) 39(666.703,675.29) 39(667.465,661.447)
  round 5 hole 2.54 slot 4 at 77 deg: 39(663.957,725.432) 39(666.957,668.432)
  round 5 hole 2.54 slot 4 at 110 deg: 39(664.211,711.843) 39(664.973,698) 39(667.211,654.843) 39(667.973,641)
  round 5 hole 2.54 slot 4 at 103 deg: 39(664.465,704.985) 39(667.465,647.985)
  rect 2.8x2.8 hole 2.54 square rot 110: 39(664.973,765) 39(729.108,779.351) 39(729.87,765.508)
  rect 2.8x2.8 hole 2.54 square rot 70: 39(728.6,799.798) 39(729.362,785.955)
  round 5 hole 2.54 slot 4 at 154 deg: 39(728.854,725.94) 39(731.854,668.94)
  rect 2.8x2.8 hole 2.54 square rot 77: 39(728.854,792.94)
  round 5 hole 2.54 slot 4 at 26 deg: 39(729.362,705.493) 39(732.362,648.493)
  rect 2.8x2.8 hole 2.54 square rot 103: 39(729.362,772.493)
  round 5 hole 2.54 slot 4 at 87 deg: 40(669.291,725.559) 40(672.291,668.559)
  round 5 hole 2.54 slot 4 at 93 deg: 40(669.799,705.112) 40(672.799,648.112)
  rect 2.8x2.8 hole 2.54 square rot 100: 40(670.307,765.127) 40(734.442,779.478) 40(735.204,765.635)
  round 5 hole 2.54 slot 4 at 174 deg: 40(734.188,726.067) 40(737.188,669.067)
  rect 2.8x2.8 hole 2.54 square rot 87: 40(734.188,793.067)
  round 5 hole 2.54 slot 4 at 6 deg: 40(734.696,705.62) 40(737.696,648.62)
  rect 2.8x2.8 hole 2.54 square rot 93: 40(734.696,772.62)
  round 5 hole 2.54 slot 4 at 90 deg: 41(675.006,732.29) 41(675.514,711.843) 41(675.768,718.447) 41(676.276,698) 41(678.006,675.29) 41(678.514,654.843) 41(678.768,661.447) 41(679.276,641)
  round 5 hole 2.54 slot 4 at 97 deg: 41(675.26,725.432) 41(678.26,668.432)
  round 5 hole 2.54 slot 4 at 83 deg: 41(675.768,704.985) 41(678.768,647.985)
  rect 2.8x2.8 hole 2.54 square rot 97: 41(740.157,792.94)
  rect 2.8x2.8 hole 2.54 square rot 83: 41(740.665,772.493)

## Via types
v1: diameter 0.9, hole 0.4, Top Layer to Bottom Layer, 1 vias

## Nets (pads, with @x,y where several pads share a name; then routed paths per layer and width w, separated by ;. In a path a pad name is that pad's centre, name@x,y a point inside that pad or via, vN(x,y) a via of type N, cw(c..) or ccw(c..) an arc to the next point about the centre after c; other vN are vias at no path point)
pads on no net: Designator20.0 Designator20.1
copper on no net: | length 32247.5